# EAGLE board Full_power (EAGLE 7.7.0)
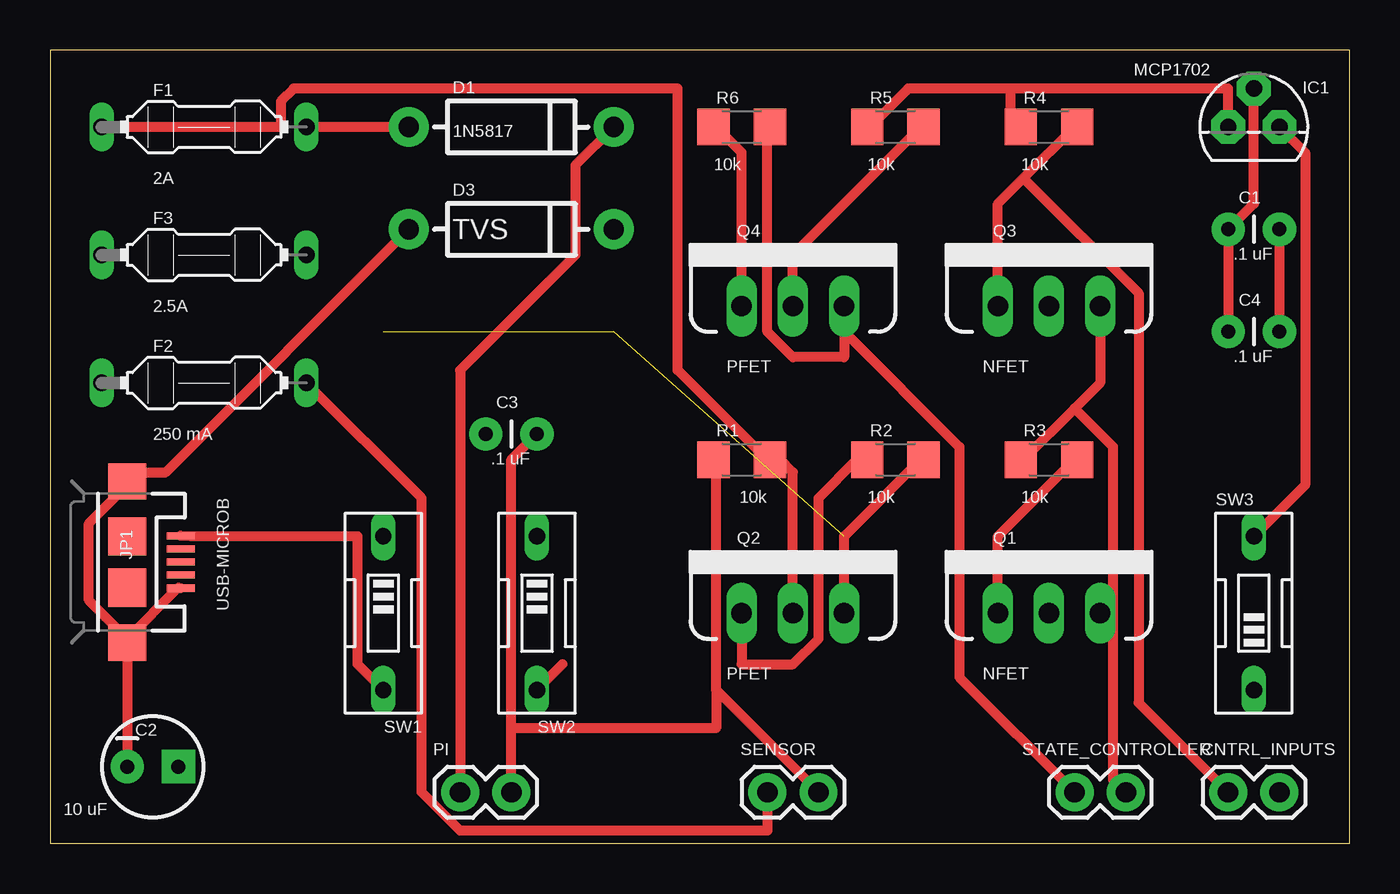
[diagram p0: board, top side]
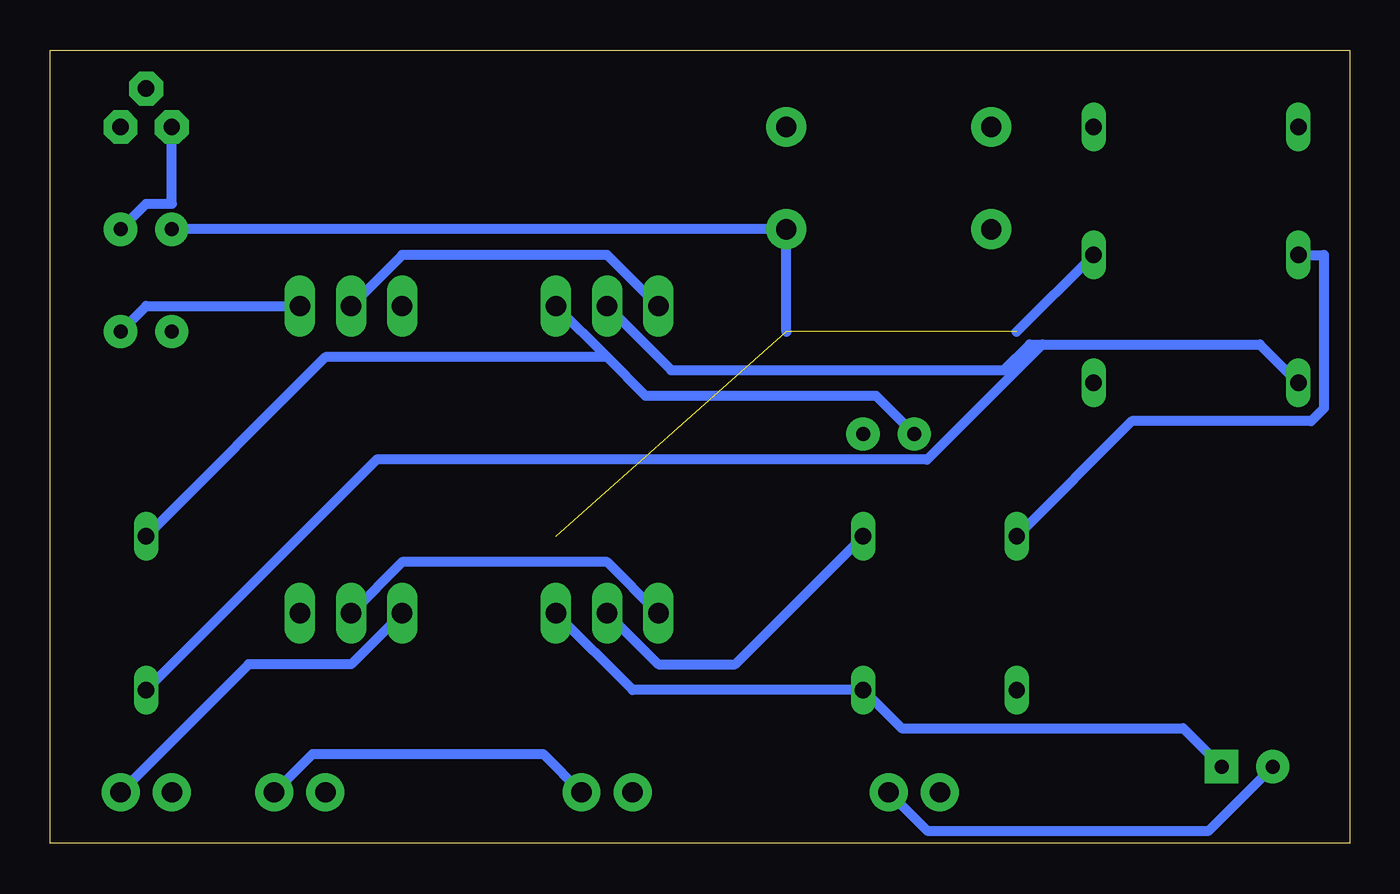
[diagram p1: board, bottom side, seen from below]

Size 64.44 x 39.36 mm. Coordinates in mm from the lower left corner, seen from the top.
Outline: 0,0 64.44,0 64.44,39.36 0,39.36 0,0
Copper layers (1*16): Top 0.0356mm / dielectric 1.5011mm / Bottom 0.0356mm
Design rules "LaenPCBOrder": minimum track width 6mil, minimum drill 13mil, track to track 6mil, track to pad 6mil, pad to pad 6mil, via to via 6mil, smd to smd 6mil, copper to edge 15mil, drill to drill 6mil, minimum pad ring 7mil, minimum via ring 7mil, stop-mask expansion 3mil, vias tented up to drill 0mil, thermal gap 10mil
Net classes: 0 default: width 0.508 mm

## Footprints (pad centres in the part's own frame; a part is rotated, then mirrored left to right if it is on the bottom)
CAP-PTH-SMALL = drill 0.7 pad 1.651: 1 0,0; 2 2.54,0
CPOL-RADIAL-10UF-25V = drill 0.7 pad 1.651 square: 1 1.27,0 | drill 0.7 pad 1.651: 2 -1.27,0
1X02 = drill 1.016 pad 1.88: 1 0,0; 2 2.54,0
DIODE-1N4001 = drill 1 pad 1.981: A -5.08,0; C 5.08,0
PICOFUSE = drill 0.813 long: 1 -5.08,0; 2 5.08,0
TO92 = drill 0.813 pad 1.676 octagon: 1 -1.27,0; 2 0,1.905; 3 1.27,0
USB-MICROB = smd 0.35 x 1.4: D+ 0,2.65; D- -0.65,2.65; GND 1.3,2.65; ID 0.65,2.65; VBUS -1.3,2.65 | smd 1.8 x 1.9: MT1 -4,0; MT2 4,0 | smd 1.9 x 1.9: P$1 -1.27,0; P$2 1.27,0
TO220V = drill 1.016 long: 1 -2.54,0; 2 0,0; 3 2.54,0
1206 = smd 1.6 x 1.8: 1 -1.4,0; 2 1.4,0
EDG-01 = drill 0.813 long: 1 0,-3.81; 2 0,3.81

## Placement (x,y rotation side)
C1  .1 uF  [CAP-PTH-SMALL]  58.42,30.48 0 top
C2  10 uF  [CPOL-RADIAL-10UF-25V]  5.08,3.81 0 top
C3  .1 uF  [CAP-PTH-SMALL]  21.59,20.32 0 top
C4  .1 uF  [CAP-PTH-SMALL]  58.42,25.4 0 top
CNTRL_INPUTS  [1X02]  58.42,2.54 0 top
D1  1N5817  [DIODE-1N4001]  22.86,35.56 0 top
D3  TVS  [DIODE-1N4001]  22.86,30.48 0 top
F1  2A  [PICOFUSE]  7.62,35.56 0 top
F2  250 mA  [PICOFUSE]  7.62,22.86 0 top
F3  2.5A  [PICOFUSE]  7.62,29.21 0 top
IC1  MCP1702  [TO92]  59.69,35.56 0 top
JP1  USB-MICROB  [USB-MICROB]  3.81,13.97 270 top
PI  [1X02]  20.32,2.54 0 top
Q1  NFET  [TO220V]  49.53,11.43 0 top
Q2  PFET  [TO220V]  36.83,11.43 0 top
Q3  NFET  [TO220V]  49.53,26.67 0 top
Q4  PFET  [TO220V]  36.83,26.67 0 top
R1  10k  [1206]  34.29,19.05 0 top
R2  10k  [1206]  41.91,19.05 0 top
R3  10k  [1206]  49.53,19.05 0 top
R4  10k  [1206]  49.53,35.56 0 top
R5  10k  [1206]  41.91,35.56 0 top
R6  10k  [1206]  34.29,35.56 0 top
SENSOR  [1X02]  35.56,2.54 0 top
STATE_CONTROLLER  [1X02]  50.8,2.54 0 top
SW1  [EDG-01]  16.51,11.43 180 top
SW2  [EDG-01]  24.13,11.43 180 top
SW3  [EDG-01]  59.69,11.43 0 top

## Library data of the parts
C1 C2 = SparkFun-Passives
C3 C4 = SparkFun-Capacitors
CNTRL_INPUTS PI SENSOR STATE_CONTROLLER = SparkFun-Connectors
D1 D3 = SparkFun-DiscreteSemi
F1-F3 = fuse; OC_FARNELL: unknown; OC_NEWARK: unknown
IC1 = adafruit
JP1 = SparkFun-Connectors; PROD_ID: CONN-09505
Q1-Q4 = User-Submitted
R1-R6 = SparkFun-Resistors
SW1-SW3 = special

## Nets
3.3V: C3.1 IC1.3 Q4.3 R6.2 STATE_CONTROLLER.1 SW3.2
5V: C1.1 C2.1 C4.1 D3.C F3.2 IC1.2 Q2.3 R2.2 SW2.2
5V_RAW: JP1.VBUS SW1.2
5V_SWITCH: F3.1 SW1.1
GND-ISO: C1.2 C2.2 C3.2 C4.2 D3.A IC1.1 JP1.GND JP1.MT1 JP1.MT2 PI.2 Q1.3 Q3.3 R1.1 R3.1 R4.1 R5.1 SENSOR.2 STATE_CONTROLLER.2
N$1: Q3.2 Q4.1 R6.1
N$2: Q1.2 Q2.1 R2.1
N$4: F1.1 Q2.2 R1.2 SW2.1
N$5: D1.A F1.2
N$6: F2.1 Q4.2 R5.2 SW3.1
PI_5V: D1.C PI.1
PI_PWR_CNTRL: CNTRL_INPUTS.2 Q1.1 R3.2
SENSOR_POWER: F2.2 SENSOR.1
SENSOR_PWR_CNTRL: CNTRL_INPUTS.1 Q3.1 R4.2

## Tracks (layer width: path | path; a pad name or v marks a point on that pad's centre or on a via)
3.3V
  Top 0.508: SW3.2 62.23,17.78 62.23,34.29 IC1.3 | 39.37,25.4 39.37,24.13 36.83,24.13 35.56,25.4 35.56,35.56 R6.2 | STATE_CONTROLLER.1 45.09,8.26 45.09,19.69 39.37,25.4 | 39.37,25.4 Q4.3
  Bottom 0.508: C3.1 23.5,22.23 34.92,22.23 36.83,24.13 | Q4.3 36.83,24.13 | SW3.2 50.8,24.13 36.83,24.13
5V  (2 unrouted)
  Top 0.508: C4.1 C1.1 59.69,31.75 IC1.2 | Q2.3 39.37,15.24 43.18,19.05 R2.2 | 25.4,8.89 SW2.2
  Bottom 0.508: C2.1 8.26,5.71 22.23,5.71 SW2.2 35.56,7.62 Q2.3 | 27.94,25.4 D3.C C1.1 | 16.51,25.4 F3.2
5V_RAW
  Top 0.508: SW1.2 15.24,8.89 15.24,15.24 6.99,15.24 JP1.VBUS
5V_SWITCH
  Bottom 0.508: SW1.1 10.79,20.95 1.91,20.95 1.27,21.59 1.27,29.21 F3.1
GND-ISO
  Top 0.508: 3.81,10.16 6.35,12.7 JP1.GND | 3.81,10.16 1.91,12.06 1.91,15.88 3.81,17.78 JP1.MT1 3.81,18.41 5.71,18.41 D3.A | 3.81,10.16 JP1.MT2 C2.2 | C3.2 22.86,19.05 22.86,5.71 | PI.2 22.86,5.71 | 33.02,7.62 33.02,19.05 R1.1 | SENSOR.2 33.02,7.62 | 22.86,5.71 33.02,5.71 33.02,7.62 | 50.8,21.59 52.07,22.86 Q3.3 | 50.8,21.59 48.26,19.05 R3.1 | 52.7,10.8 52.7,3.17 STATE_CONTROLLER.2 | 50.8,21.59 52.7,19.69 52.7,10.8 | 52.7,10.8 Q1.3 | 47.62,37.47 42.55,37.47 40.64,35.56 R5.1 | 47.62,37.47 47.62,35.56 R4.1 | C1.2 C4.2 | 47.62,37.47 58.42,37.47 IC1.1
  Bottom 0.508: IC1.1 58.42,31.75 59.69,31.75 C1.2 | Q3.3 59.69,26.67 C4.2 | SENSOR.2 40.01,4.45 51.44,4.45 STATE_CONTROLLER.2 | C2.2 6.99,0.63 20.95,0.63 PI.2
N$1
  Top 0.508: Q4.1 34.29,34.29 33.02,35.56 R6.1
  Bottom 0.508: Q3.2 46.99,29.21 36.83,29.21 Q4.1
N$2
  Top 0.508: Q2.1 34.29,8.89 36.83,8.89 38.1,10.16 38.1,17.14 40.01,19.05 R2.1
  Bottom 0.508: Q1.2 46.99,13.97 36.83,13.97 Q2.1
N$4
  Top 0.508: Q2.2 36.83,18.41 36.2,19.05 R1.2 35.56,19.05 31.11,23.5 31.11,37.47 12.06,37.47 11.43,36.83 11.43,35.56 F1.1
  Bottom 0.508: SW2.1 30.48,8.89 34.29,8.89 Q2.2
N$5
  Top 0.508: D1.A F1.2
N$6
  Top 0.508: Q4.2 36.83,29.21 43.18,35.56 R5.2
  Bottom 0.508: F2.1 4.45,24.77 15.24,24.77 | 15.24,24.77 15.88,24.77 17.14,23.5 33.66,23.5 Q4.2 | SW3.1 48.26,19.05 20.95,19.05 15.24,24.77
PI_5V
  Top 0.508: PI.1 20.32,23.5 26.04,29.21 26.04,33.66 D1.C
PI_PWR_CNTRL
  Top 0.508: Q1.1 46.99,15.24 50.8,19.05 R3.2
  Bottom 0.508: CNTRL_INPUTS.2 54.61,8.89 49.53,8.89 Q1.1
SENSOR_POWER
  Top 0.508: F2.2 18.41,17.14 18.41,2.54 20.32,0.63 35.56,0.63 SENSOR.1
SENSOR_PWR_CNTRL
  Top 0.508: 48.26,33.02 46.99,31.75 Q3.1 | 48.26,33.02 50.8,35.56 R4.2 | CNTRL_INPUTS.1 53.98,6.98 53.98,27.3 48.26,33.02